# Altium PCB PCB1.PcbDoc
Units mil, origin at the board's own origin, x right, y up, seen from the top; angles counter-clockwise.
Board outline 6445 x 7795 mil, 2 copper layers (Top Layer, Bottom Layer); 48 components, 56 nets, 155 pads, 18 vias.
Unrouted connection lines stored in the file: 4.
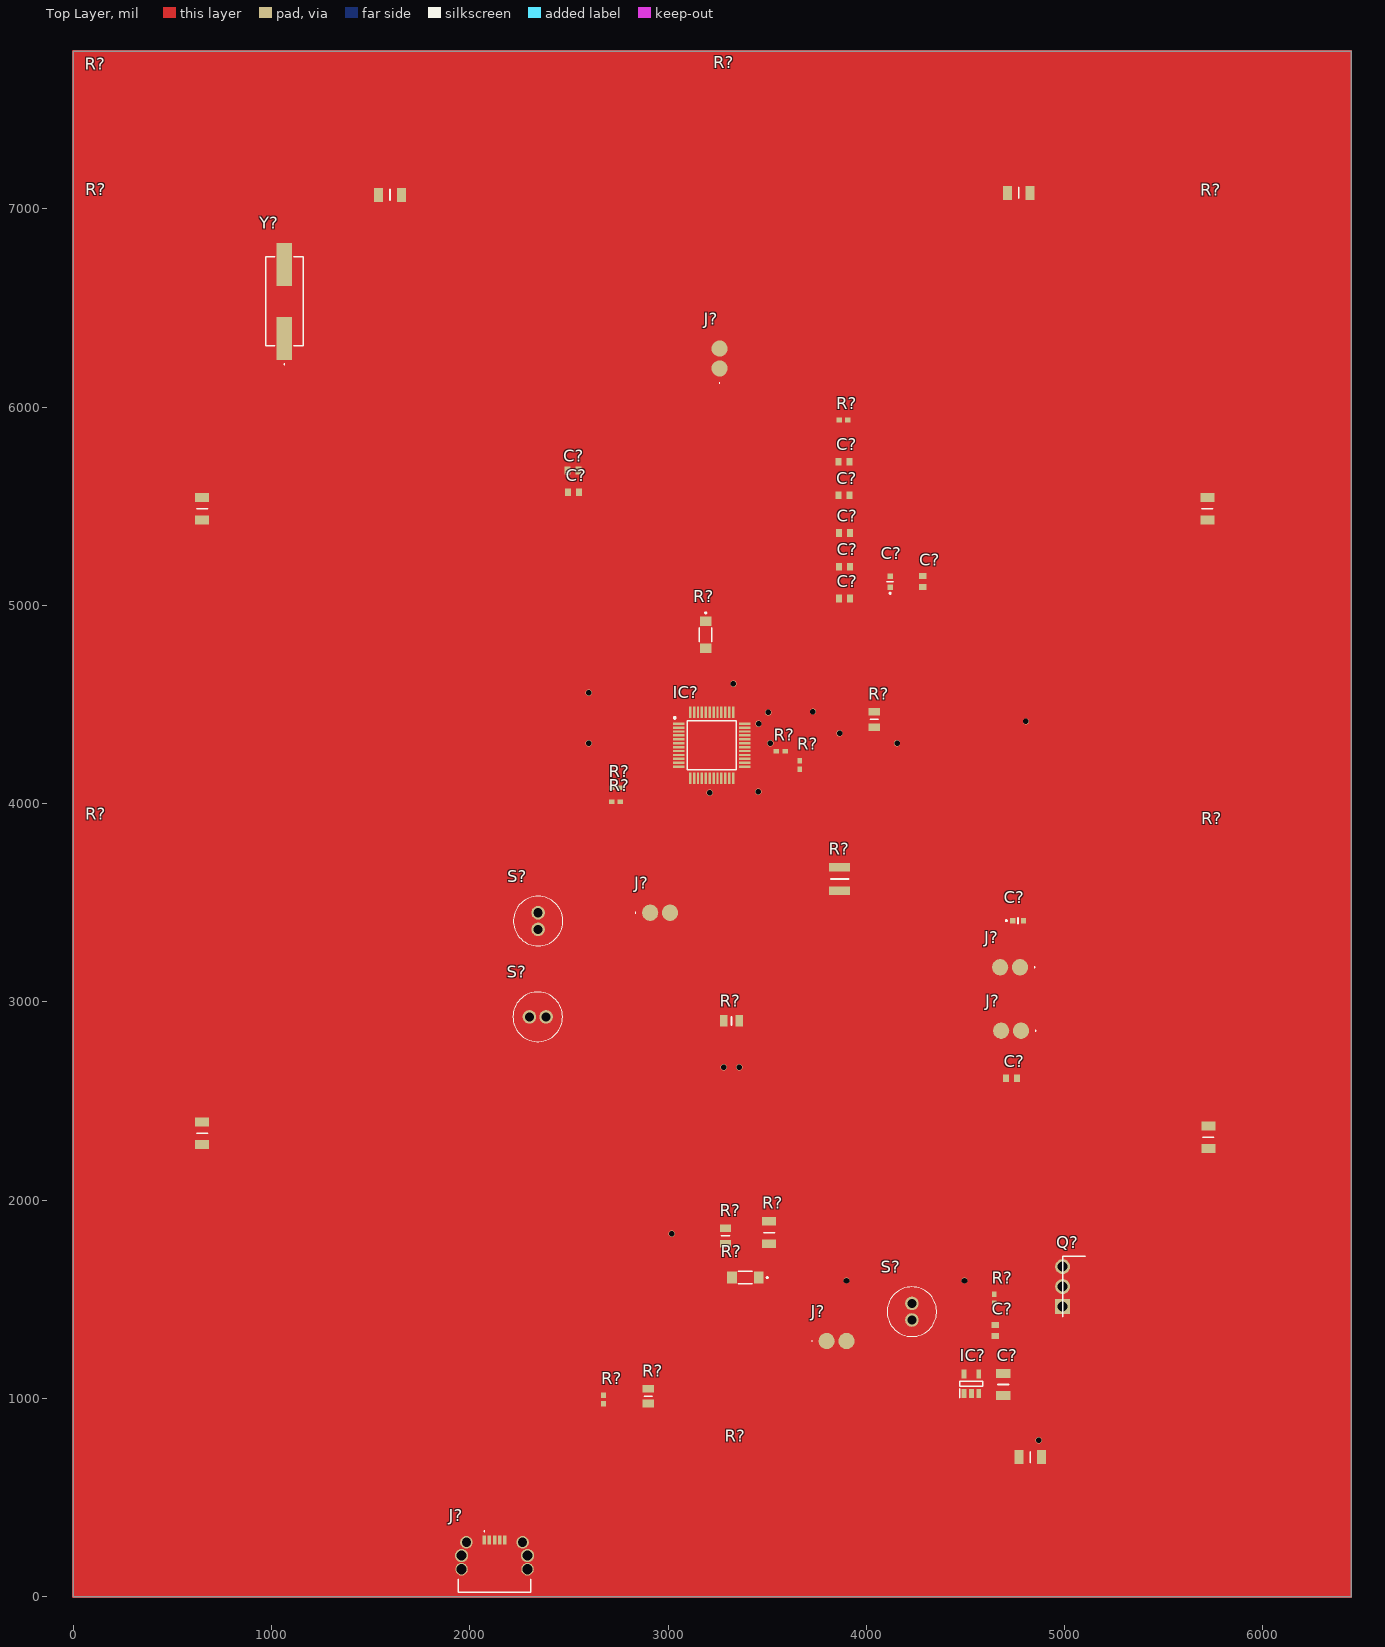
[diagram p0: Top Layer view]
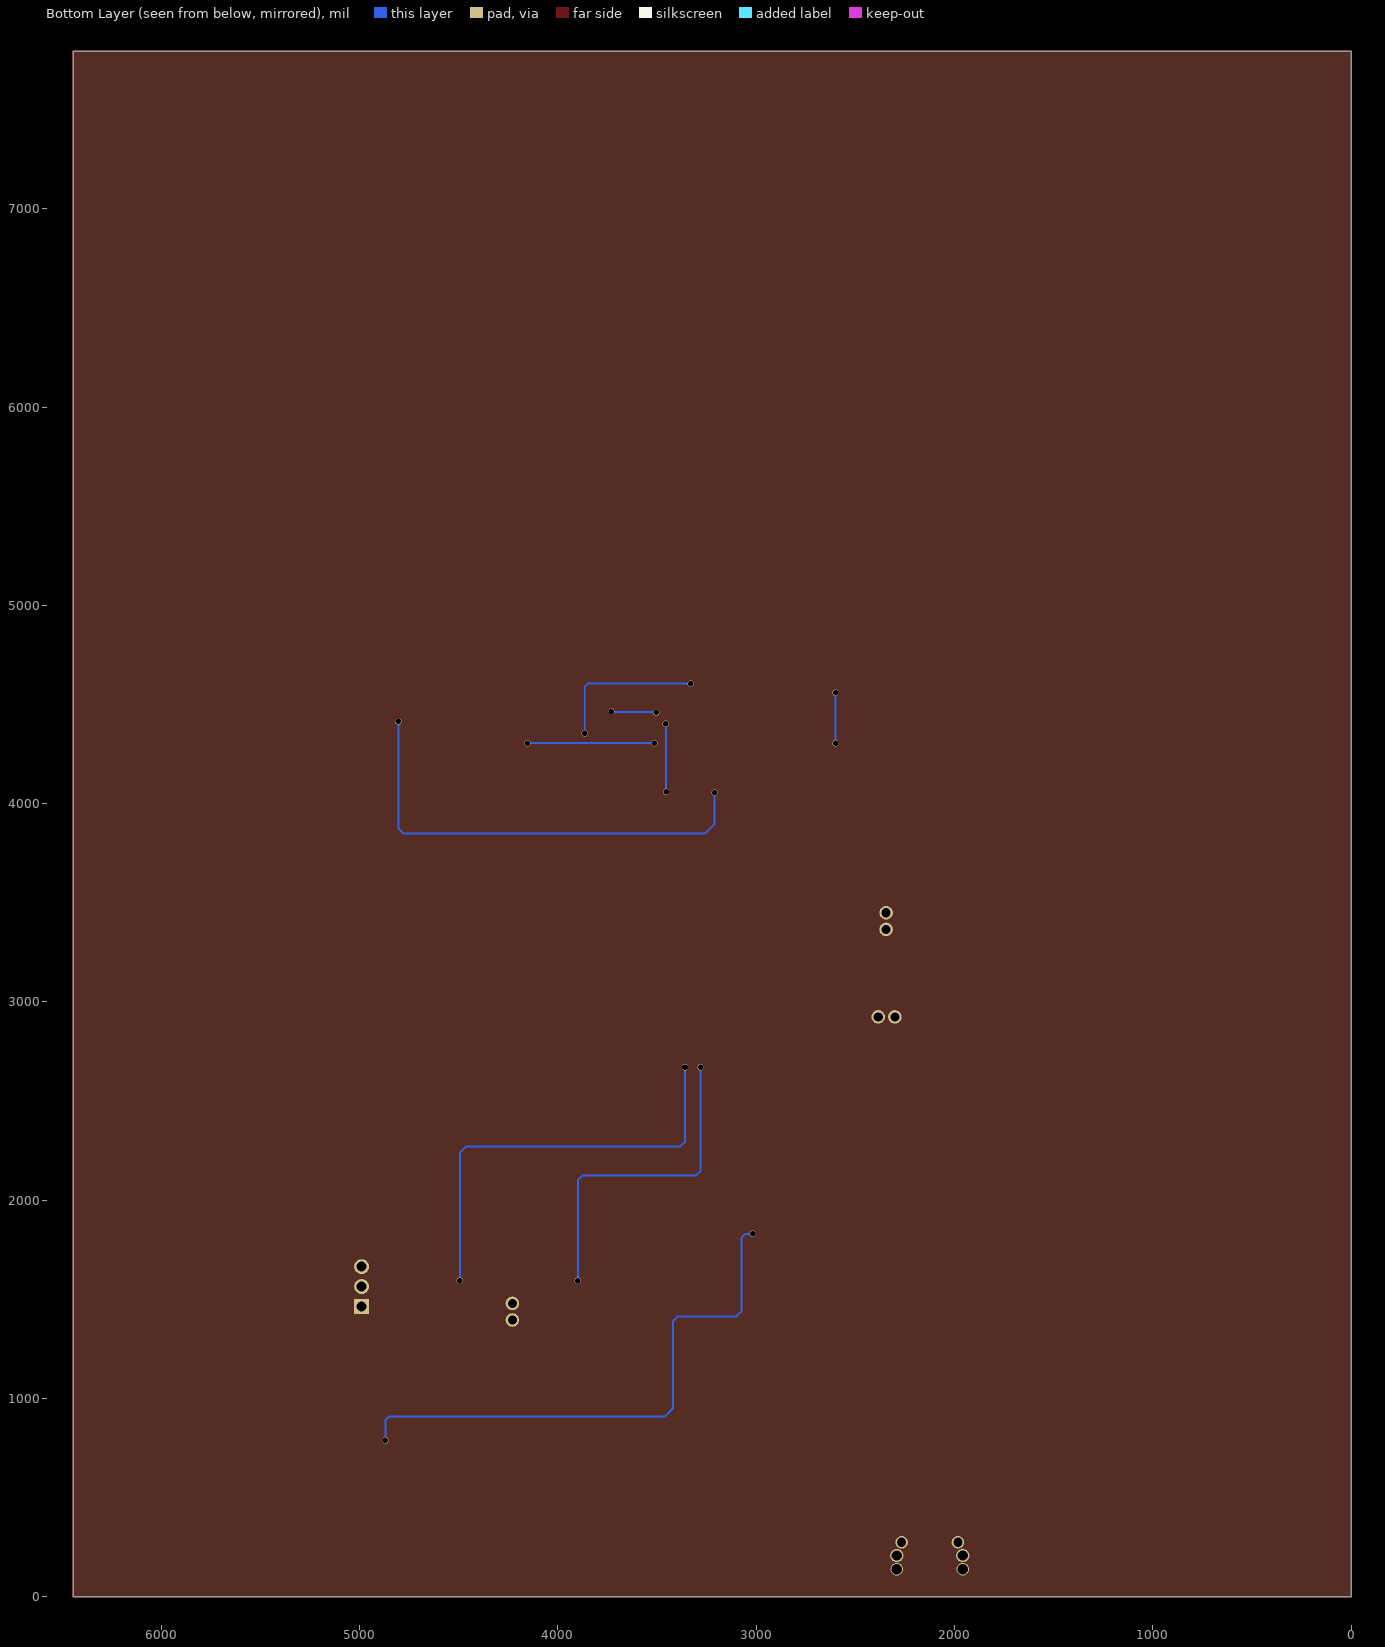
[diagram p1: Bottom Layer view, seen from below]
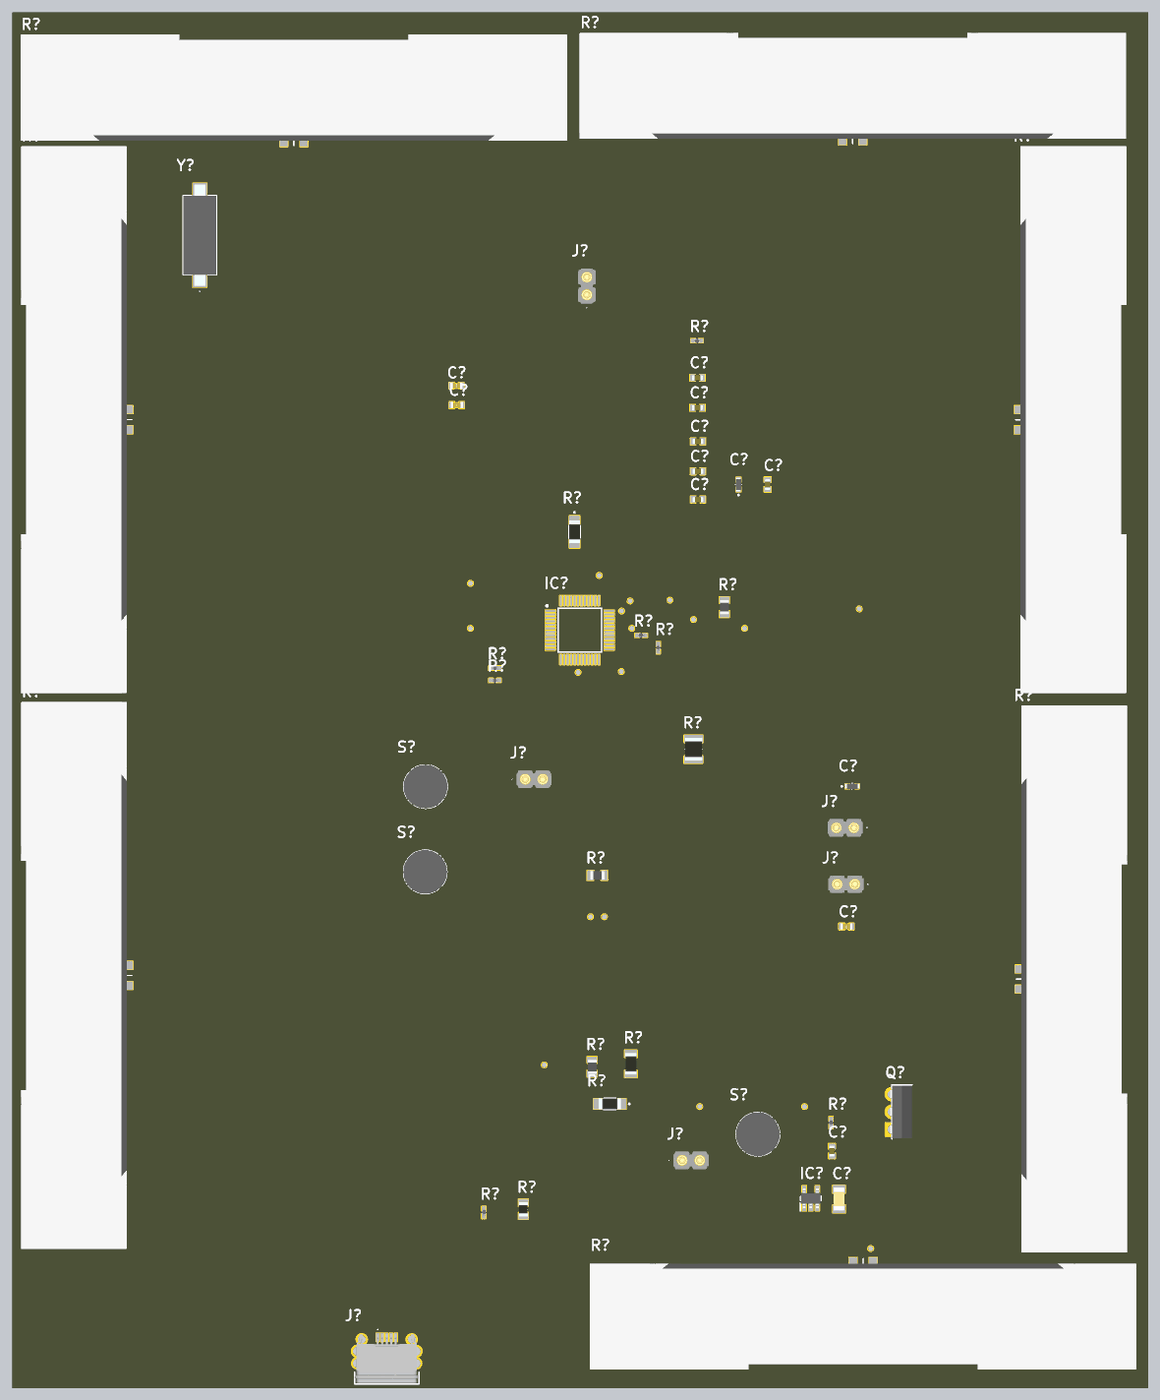
[diagram p2: 3D render of the assembled board from above, using the file's embedded part models]

## Layer stack, top to bottom
Top Solder: solder mask 0.4, Solder Resist, Dk 3.5
Top Layer: signal copper 1.4
Dielectric 1: dielectric 12.6, FR-4, Dk 4.8
Bottom Layer: signal copper 1.4
Bottom Solder: solder mask 0.4, Solder Resist, Dk 3.5

## Board outline
0,0 0,7795 6445,7795 6445,0

## Design rules (kind name [scope] priority, off if disabled: settings)
Clearance [All] p1: gap=10 ignorepadtopadclearanceinfootprint=FALSE
PolygonConnect [All] p1: connectstyle=Relief reliefconductorwidth=10 reliefentries=4 polygonreliefangle="90 Angle" airgapwidth=10
RoutingVias [All] p1: holewidth=28 width=50 viastyle="Through Hole" minholewidth=28 minwidth=50 maxholewidth=28 maxwidth=50
SolderMaskExpansion [All] p1: expansion=4 istentingtop=FALSE
SupplyNets "Schematic Supply Nets_5" [InNet('E5V')] p1: voltage=0.000
SupplyNets "Schematic Supply Nets_4" [InNet('+33V3')] p2: voltage=0.000
SupplyNets "Schematic Supply Nets_3" [InNet('GND')] p3: voltage=0.000
SupplyNets "Schematic Supply Nets_2" [InNet('+3VC_ST_LINK')] p4: voltage=0.000
SupplyNets "Schematic Supply Nets_1" [InNet('U5V')] p5: voltage=0.000
SupplyNets "Schematic Supply Nets" [InNet('+33V3_ST_LINK')] p6: voltage=0.000
Width [All] p1: maxlimit=10 minlimit=10 preferedwidth=10
30 further rules are at their usual default settings.

## Classes and differential pairs
component class Sheet2: C? CN? D? GREEN IC? J? Q? RED SB? Y?

## Components (designator, comment, footprint, x,y, rotation, side; value= is the part's Value field where it differs from the comment)
C? "C0603C200F5GACTU" CAPC1608X87N 4732.44,2615 r180 top
C? "06035C104K4T4A" CAPC1608X90N 3890,5365 r180 top
C? "06035C104K4T4A" CAPC1608X90N 4285,5120 r90 top
C? "C0603C200F5GACTU" CAPC1608X87N 2522.56,5570 r0 top
C? "KGM31GCG2J103JU" CAPC3316X145N 4690,1070.91 r90 top
C? "06035C104K4T4A" CAPC1608X90N 4650,1342.44 r90 top
C? "06035C104K4T4A" CAPC1608X90N 3887.56,5725 r0 top
C? "06035C104K4T4A" CAPC1608X90N 3887.44,5555 r180 top
C? "06035C104K4T4A" CAPC1608X90N 3890,5035 r0 top
C? "MAJCT168BB7105KTEA01" MAJx16 4765,3410 r0 top
C? "C0603C200F5GACTU" CAPC1608X87N 2520,5680 r0 top
C? "MAJCT168BB7105KTEA01" MAJx16 4120,5120 r90 top
C? "06035C104K4T4A" CAPC1608X90N 3890,5195 r180 top
IC? "STM32F103CBT6" QFP50P900X900X160-48N 3220,4295 r0 top
IC? "LD3985M33R" SOT95P280X145-5N 4530,1075 r90 top
J? "" 8122200230004191 2960,3450 r0 top
J? "" 8122200230004191 4725,3175 r180 top
J? "204926-1103" 2049261103 2125,160 r0 top
J? "812-22-002-30-004191" 8122200230004191 3260,6245 r90 top
J? "" 8122200230004191 4730,2855 r180 top
J? "" 8122200230004191 3850,1290 r0 top
Q? "BD139" TO254P290X760X1320-3P 4990,1465 r90 top
R? "MCS04020C1000FE000" RESC1005X37N 2675,995 r270 top
R? "CRMV1206AF10K0FKE5" RESC3216X74N 650,2337.91 r270 top
R? "MCS04020D4701BE000" RESC1005X37N 2738.35,4080 r0 top
R? "CRMV1206AF10K0FKE5" RESC3216X74N 5724.61,2317.46 r90 top
R? "MCS04020D4701BE000" RESC1005X37N 2738.35,4010 r0 top
R? "CRMV1206AF10K0FKE5" RESC3216X74N 650,5487.91 r270 top
R? "CRMV1206AF10K0FKE5" RESC3216X74N 1597.91,7070 r180 top
R? "CRMV1206AF10K0FKE5" RESC3216X74N 4767.91,7080 r180 top
R? "TNPW080536K0BEEA" RESC2012X55N 2900,1012.4 r270 top
R? "MCS04020C1000FE000" RESC1005X37N 3568.35,4265 r0 top
R? "CRCW12102K70FKEAHP" RESC3225X70N 3865,3620 r90 top
R? "MCS04020D4701BE000" RESC1005X37N 3885,5935 r0 top
R? "ERA-8VRB1003V" ERA8KEB1004V 3190,4852.09 r270 top
R? "CRCW12061K50FKEAHP" RESC3116X65N 3510,1837.09 r270 top
R? "WSL080500000ZEA9" RESC2013X84N 3320,2905 r0 top
R? "MCS04020C1000FE000" RESC1005X37N 3665,4195 r90 top
R? "CRMV1206AF10K0FKE5" RESC3216X74N 5720,5487.09 r90 top
R? "WSL080500000ZEA9" RESC2013X84N 3290,1820 r90 top
R? "MCS04020D4701BE000" RESC1005X37N 4645,1503.35 r90 top
R? "WSL080500000ZEA9" RESC2013X84N 4040,4425 r90 top
R? "ERA-8VRB1003V" ERA8KEB1004V 3390,1610 r180 top
R? "CRMV1206AF10K0FKE5" RESC3216X74N 4827.09,705 r0 top
S? "8631CQD2" 8631CQD2 2301.14,2925 r0 top
S? "8631CQD2" 8631CQD2 2345,3366.14 r90 top
S? "8631CQD2" 8631CQD2 4230,1396.14 r90 top
Y? "ECS-80-12-5PX-GM-TR" ECS80125PXGMTR 1065,6532.99 r90 top

## Footprints (in the part's own frame and the unit in brackets; to place one, negate y for a bottom-side part, rotate by r counter-clockwise, add the part's x,y. Pads: shape width x height; smd on the part's side, far side on the other; paste and mask are expansions set on the pad)
8631CQD2 [mm]
  round 1.74 hole 1.16: 1(0,0) 2(2.13,0)
  silkscreen extent -2.11,-3.17 4.24,3.17, body extent -2.11,-3.17 4.24,3.17, height 14.03
2049261103 [mm]
  rect 0.45x1.2 smd: 1(-1.3,3.225) 2(-0.65,3.225) 3(0,3.225) 4(0.65,3.225) 5(1.3,3.225)
  round 1.6 hole 1.17: MH1(-3.6,2.925) MH2(3.6,2.925)
  round 1.7 hole 1.3: MH3(-4.225,1.225) MH4(4.225,1.225)
  round 1.6 hole 1.3: MH5(-4.225,-0.525) MH6(4.225,-0.525)
  silkscreen extent -4.65,-3.47 4.65,4.4, body extent -4.65,-3.32 4.65,3.68, height 3.83
8122200230004191 [mm]
  round 2.08 smd: 1(-1.27,0) 2(1.27,0)
  silkscreen extent -3.2,-0.05 -3.1,0.05, body extent -2.54,-1.27 2.54,1.27, height 8.51
CAPC1608X87N [mm]
  rect 0.78x0.98 smd: 1(-0.7,0) 2(0.7,0)
  body extent -0.87,-0.48 0.88,0.47, height 0.87
CAPC1608X90N [mm]
  rect 0.78x0.99 smd: 1(-0.7,0) 2(0.7,0)
  body extent -0.8,-0.41 0.8,0.41, height 0.9
CAPC3316X145N [mm]
  rect 1.17x1.82 smd: 1(-1.42,0) 2(1.42,0)
  silkscreen extent 0,-0.7 0,0.7, body extent -1.65,-0.8 1.65,0.8, height 1.68
ECS80125PXGMTR [mm]
  rect 5.5x2 smd: 1(-4.75,0) 2(4.75,0)
  silkscreen extent -8.1,-2.4 5.7,2.4, body extent -7.3,-2.4 7.3,2.4, height 4.4
ERA8KEB1004V [mm]
  rect 1.25x1.5 smd: 1(-1.725,0) 2(1.725,0)
  silkscreen extent -2.9,-0.8 0.9,0.8, body extent -1.6,-0.8 1.6,0.8, height 0.65
MAJx16 [mm]
  rect 0.7x0.7 smd: 1(-0.7,0) 2(0.7,0)
  silkscreen extent -1.6,-0.4 0,0.4, body extent -0.98,-0.4 0.98,0.4, height 0.9
QFP50P900X900X160-48N [mm]
  rect 1.475x0.3 smd: 1(-4.238,2.75) 2(-4.238,2.25) 3(-4.238,1.75) 4(-4.238,1.25) 5(-4.238,0.75) 6(-4.238,0.25) 7(-4.238,-0.25) 8(-4.238,-0.75) 9(-4.238,-1.25) 10(-4.238,-1.75) 11(-4.238,-2.25) 12(-4.238,-2.75) 25(4.238,-2.75) 26(4.238,-2.25) 27(4.238,-1.75) 28(4.238,-1.25) 29(4.238,-0.75) 30(4.238,-0.25) 31(4.238,0.25) 32(4.238,0.75) 33(4.238,1.25) 34(4.238,1.75) 35(4.238,2.25) 36(4.238,2.75)
  rect 0.3x1.475 smd: 13(-2.75,-4.238) 14(-2.25,-4.238) 15(-1.75,-4.238) 16(-1.25,-4.238) 17(-0.75,-4.238) 18(-0.25,-4.238) 19(0.25,-4.238) 20(0.75,-4.238) 21(1.25,-4.238) 22(1.75,-4.238) 23(2.25,-4.238) 24(2.75,-4.238) 37(2.75,4.238) 38(2.25,4.238) 39(1.75,4.238) 40(1.25,4.238) 41(0.75,4.238) 42(0.25,4.238) 43(-0.25,4.238) 44(-0.75,4.238) 45(-1.25,4.238) 46(-1.75,4.238) 47(-2.25,4.238) 48(-2.75,4.238)
  silkscreen extent -4.85,-3.15 3.15,3.62, body extent 0,0 0,0
RESC1005X37N [mm]
  rect 0.7x0.6 smd: 1(-0.55,0) 2(0.55,0)
  body extent -0.5,-0.25 0.5,0.25, height 0.32
RESC2012X55N [mm]
  rect 1x1.45 smd: 1(-0.95,0) 2(0.95,0)
  silkscreen extent 0,-0.53 0,0.53, body extent -1,-0.63 1,0.63, height 0.55
RESC2013X84N [mm]
  rect 0.95x1.45 smd: 1(-1,0) 2(1,0)
  silkscreen extent 0,-0.54 0,0.54, body extent -1.01,-0.64 1.01,0.64, height 0.36
RESC3116X65N [mm]
  rect 1.1x1.8 smd: 1(-1.45,0) 2(1.45,0)
  silkscreen extent 0,-0.7 0,0.7, body extent -1.55,-0.8 1.55,0.8, height 0.65
RESC3216X74N [mm]
  rect 1.15x1.8 smd: 1(-1.45,0) 2(1.45,0)
  silkscreen extent 0,-0.7 0,0.7, body extent -39.37,-15.24 39.37,0, height 40.64
RESC3225X70N [mm]
  rect 1.1x2.7 smd: 1(-1.5,0) 2(1.5,0)
  silkscreen extent 0,-1.15 0,1.15, body extent -1.6,-1.25 1.6,1.25, height 0.7
SOT95P280X145-5N [mm]
  rect 1.15x0.6 smd: 1(-1.25,0.95) 2(-1.25,0) 3(-1.25,-0.95) 4(1.25,-0.95) 5(1.25,0.95)
  silkscreen extent -1.83,-1.48 0.33,1.5, body extent -1.4,-1.48 1.4,1.48, height 1.45
TO254P290X760X1320-3P [mm]
  rect 1.92x1.92 hole 1.28: 1(0,0)
  round 1.92 hole 1.28: 2(2.54,0) 3(5.08,0)
  silkscreen extent -1.36,-2.9 6.44,0, body extent -1.26,-2.9 6.34,0.26, height 12.92

## Part data
C? C? C?: "Capacitor", Manufacturer_Name=KEMET, Mouser Part Number=80-C0603C200F5GACTU, Arrow Part Number=C0603C200F5GACTU, Arrow Price/Stock=https://www.arrow.com/en/products/c0603c200f5gactu/kemet-corporation, Datasheet Link=https://content.kemet.com/datasheets/KEM_C1003_C0G_SMD.pdf, Height=0.87mm, Manufacturer_Part_Number=C0603C200F5GACTU, Mouser Price/Stock=https://www.mouser.co.uk/ProductDetail/KEMET/C0603C200F5GACTU?qs=gt1LBUVyoHmxLY5yAwiOrg%3D%3D
C? C? C? C? C? C? C?: "Capacitor", Manufacturer_Name="Kyocera AVX", Mouser Part Number=581-06035C104K4T4A, Arrow Part Number=06035C104K4T4A, Arrow Price/Stock=https://www.arrow.com/en/products/06035c104k4t4a/avx, Datasheet Link=https://componentsearchengine.com/Datasheets/1/06031A100FAT2A.pdf, Height=0.9mm, Manufacturer_Part_Number=06035C104K4T4A, Mouser Price/Stock=https://www.mouser.co.uk/ProductDetail/KYOCERA-AVX/06035C104K4T4A?qs=NBj5Hwer2CEXBYKT%252BbuSBA%3D%3D
C?: "Capacitor", Manufacturer_Name="Kyocera AVX", Mouser Part Number=581-KGM31GCG2J103JU, Datasheet Link=https://datasheets.kyocera-avx.com/HVKGM.pdf, Height=1.45mm, Manufacturer_Part_Number=KGM31GCG2J103JU, Mouser Price/Stock=https://www.mouser.co.uk/ProductDetail/KYOCERA-AVX/KGM31GCG2J103JU?qs=63Lh8XYXgjt6ivbLeGkCxg%3D%3D
C? C?: "Capacitor", Manufacturer_Name="TAIYO YUDEN", Datasheet Link=https://ds.yuden.co.jp/TYCOMPAS/or/detail?pn=MAJCT168BB7105KTEA01, Height=0.8mm, Manufacturer_Part_Number=MAJCT168BB7105KTEA01
IC?: "Integrated Circuit", Manufacturer_Name=STMicroelectronics, Mouser Part Number=511-STM32F103CBT6, Arrow Part Number=STM32F103CBT6, Arrow Price/Stock=https://www.arrow.com/en/products/stm32f103cbt6/stmicroelectronics?region=europe, Datasheet Link=http://www.st.com/st-web-ui/static/active/en/resource/technical/document/datasheet/CD00161566.pdf, Height=1.6mm, Manufacturer_Part_Number=STM32F103CBT6, Mouser Price/Stock=https://www.mouser.co.uk/ProductDetail/STMicroelectronics/STM32F103CBT6?qs=WxFF5lh7QM3goh6GV5Ogig%3D%3D
IC?: "Integrated Circuit", Manufacturer_Name=STMicroelectronics, Mouser Part Number=511-LD3985M33R, Arrow Part Number=LD3985M33R, Arrow Price/Stock=https://www.arrow.com/en/products/ld3985m33r/stmicroelectronics?region=europe, Datasheet Link=http://www.st.com/st-web-ui/static/active/en/resource/technical/document/datasheet/CD00003395.pdf, Height=1.45mm, Manufacturer_Part_Number=LD3985M33R, Mouser Price/Stock=https://www.mouser.co.uk/ProductDetail/STMicroelectronics/LD3985M33R?qs=22WmWNTp1rrPOccVv4HZ7A%3D%3D
J? J? J? J?: library part 812-22-002-30-004191, "Connector", Manufacturer_Name=Mill-Max, Mouser Part Number=575-8122200230004191, Datasheet Link=https://www.mill-max.com/products/datasheet/sockets/812-22-002-30-004191, Height=8.51mm, Manufacturer_Part_Number=812-22-002-30-004191, Mouser Price/Stock=https://www.mouser.co.uk/ProductDetail/Mill-Max/812-22-002-30-004191?qs=iJx90KzHWBrdg0l0AGRrFg%3D%3D
J?: "Connector", Manufacturer_Name=Molex, Mouser Part Number=538-204926-1103, Arrow Part Number=204926-1103, Arrow Price/Stock=https://www.arrow.com/en/products/204926-1103/molex?region=nac, Datasheet Link=https://www.molex.com/content/dam/molex/molex-dot-com/products/automated/en-us/salesdrawingpdf/204/204926/2049261103_sd.pdf, Height=4.65mm, Manufacturer_Part_Number=204926-1103, Mouser Price/Stock=https://www.mouser.co.uk/ProductDetail/Molex/204926-1103?qs=55YtniHzbhBOQihiQOeiLg%3D%3D
J?: "Connector", Manufacturer_Name=Mill-Max, Mouser Part Number=575-8122200230004191, Datasheet Link=https://www.mill-max.com/products/datasheet/sockets/812-22-002-30-004191, Height=8.51mm, Manufacturer_Part_Number=812-22-002-30-004191, Mouser Price/Stock=https://www.mouser.co.uk/ProductDetail/Mill-Max/812-22-002-30-004191?qs=iJx90KzHWBrdg0l0AGRrFg%3D%3D
Q?: "Transistor BJT NPN", Manufacturer_Name=STMicroelectronics, Mouser Part Number=511-BD139, Arrow Part Number=BD139, Arrow Price/Stock=https://www.arrow.com/en/products/bd139/stmicroelectronics?region=europe, Datasheet Link=http://www.st.com/web/en/resource/technical/document/datasheet/CD00001225.pdf, Height=2.9mm, Manufacturer_Part_Number=BD139, Mouser Price/Stock=https://www.mouser.co.uk/ProductDetail/STMicroelectronics/BD139?qs=ljbEvF4DwOPW%2FLxHSWYMMA%3D%3D
R? R? R?: "Resistor", Manufacturer_Name=Vishay, Mouser Part Number=594-MCS04020C1000FE0, Arrow Part Number=MCS04020C1000FE000, Arrow Price/Stock=https://www.arrow.com/en/products/mcs04020c1000fe000/vishay, Datasheet Link=http://www.vishay.com/docs/28705/mcx0x0xpro.pdf, Height=0.37mm, Manufacturer_Part_Number=MCS04020C1000FE000, Mouser Price/Stock=https://www.mouser.co.uk/ProductDetail/Vishay-Beyschlag/MCS04020C1000FE000?qs=7ZE6F4QMOBYkwvQlfbkT8w%3D%3D
R? R? R? R? R? R? R?: "Resistor", Manufacturer_Name=Vishay, Mouser Part Number=71-RMV1206AF10K0FKE5, Datasheet Link=https://www.vishay.com/docs/68037/crmv.pdf, Height=0.74mm, Manufacturer_Part_Number=CRMV1206AF10K0FKE5, Mouser Price/Stock=https://www.mouser.co.uk/ProductDetail/Vishay-Techno/CRMV1206AF10K0FKE5?qs=l8RvIzyJx4lLA%2F4RSSc%2F9A%3D%3D
R? R? R? R?: "Resistor", Manufacturer_Name=Vishay, Mouser Part Number=594-MCS04020D4701BE0, Datasheet Link=http://www.vishay.com/docs/28705/mcx0x0xpro.pdf, Height=0.37mm, Manufacturer_Part_Number=MCS04020D4701BE000, Mouser Price/Stock=https://www.mouser.co.uk/ProductDetail/Vishay-Beyschlag/MCS04020D4701BE000?qs=ft9OtscSA3%252BR0DpF5QqL2Q%3D%3D
R?: "Resistor", Manufacturer_Name=Vishay, Datasheet Link=https://www.vishay.com/docs/31006/tnpw.pdf, Height=0.55mm, Manufacturer_Part_Number=TNPW080536K0BEEA
R?: "Resistor", Manufacturer_Name=Vishay, Mouser Part Number=71-CRCW12102K70FKEAH, Datasheet Link=http://componentsearchengine.com/Datasheets/1/CRCW12102K70FKEAHP.pdf, Height=0.7mm, Manufacturer_Part_Number=CRCW12102K70FKEAHP, Mouser Price/Stock=https://www.mouser.co.uk/ProductDetail/Vishay-Dale/CRCW12102K70FKEAHP?qs=OAzHGkhREL0m0%252BU1n6AaAg%3D%3D
R? R?: "Resistor", Manufacturer_Name=Panasonic, Mouser Part Number=667-ERA-8VRB1003V, Datasheet Link=https://industrial.panasonic.com/cdbs/www-data/pdf/RDM0000/RDM0000C331.pdf, Height=0.65mm, Manufacturer_Part_Number=ERA-8VRB1003V, Mouser Price/Stock=https://www.mouser.co.uk/ProductDetail/Panasonic/ERA-8VRB1003V?qs=By6Nw2ByBD3GbaEFFbsd4A%3D%3D
R?: "Resistor", Manufacturer_Name=Vishay, Mouser Part Number=71-CRCW12061K50FKEAH, Arrow Part Number=CRCW12061K50FKEAHP, Arrow Price/Stock=https://www.arrow.com/en/products/crcw12061k50fkeahp/vishay?region=nac, Datasheet Link=http://componentsearchengine.com/Datasheets/1/CRCW12061K50FKEAHP.pdf, Height=0.65mm, Manufacturer_Part_Number=CRCW12061K50FKEAHP, Mouser Price/Stock=https://www.mouser.co.uk/ProductDetail/Vishay-Dale/CRCW12061K50FKEAHP?qs=k2%2FDWSARqgEwHXAQbL4aEg%3D%3D
R? R? R?: "Resistor", Manufacturer_Name=Vishay, Mouser Part Number=71-WSL080500000ZEA9, Arrow Part Number=WSL080500000ZEA9, Arrow Price/Stock=https://www.arrow.com/en/products/wsl080500000zea9/vishay?region=nac, Datasheet Link=https://ad.componentsearchengine.com/Datasheets/2/WSL080500000ZEA9.pdf, Height=0.838mm, Manufacturer_Part_Number=WSL080500000ZEA9, Mouser Price/Stock=https://www.mouser.co.uk/ProductDetail/Vishay-Dale/WSL080500000ZEA9?qs=f1l5vAGoKgsImKS87N8TmQ%3D%3D
S? S? S?: "Switch (2-Pin Push)", Manufacturer_Name="C & K COMPONENTS", Mouser Part Number=611-8631-261, Datasheet Link=https://www.ckswitches.com/media/1396/8600.pdf, Height=13.93mm, Manufacturer_Part_Number=8631CQD2, Mouser Price/Stock=https://www.mouser.co.uk/ProductDetail/CK/8631CQD2?qs=ktcBc77oICXe9iPhfEwnkA%3D%3D
Y?: "Crystal or Oscillator", Manufacturer_Name=ECS, Mouser Part Number=520-80-12-5PX-GM-TR, Datasheet Link=https://ecsxtal.com/store/pdf/csm-7x.pdf, Height=4.3mm, Manufacturer_Part_Number=ECS-80-12-5PX-GM-TR, Mouser Price/Stock=https://www.mouser.co.uk/ProductDetail/ECS/ECS-80-12-5PX-GM-TR?qs=amGC7iS6iy%252BwzUdIY7WpOA%3D%3D

## Via types
v1: diameter 31.5, hole 28, Top Layer to Bottom Layer, 18 vias

## Nets (pads, with @x,y where several pads share a name; then routed paths per layer and width w, separated by ;. In a path a pad name is that pad's centre, name@x,y a point inside that pad or via, vN(x,y) a via of type N, cw(c..) or ccw(c..) an arc to the next point about the centre after c; other vN are vias at no path point)
+3VC_ST_LINK: 
+33V3: R?.1@2716.69,4080
+33V3_ST_LINK: C?.1@3915,5555 C?.1@3917.56,5195 C?.1@3917.56,5365 C?.2@3915.12,5725 C?.2@4120,5147.56 C?.2@4285,5147.56 IC?.1@3053.15,4403.27 IC?.5@4492.6,1124.21 IC?.9 IC?.24 IC?.36 IC?.48 J?.1@3260,6195 Q?.2 R?.2@3359.37,2905 R?.2@4645,1525 | length 8827.1
  Top Layer w10: J?.1@3260,6195 3265,6190 3665,6190 3695,6160 3695,5645.12 3700.06,5640.06 3915.12,5640.06 ; IC?.24@3329.17,4127.24 IC?.24 3328.27,4077.54 3345.67,4060.14 ; v1(3359.37,2670.63) 3359.37,2914.84 3345.67,2928.54 3345.67,4060.14 ; v1(3455,4060) 3454.86,4060.14 3345.67,4060.14 ; v1(3456.73,4403.27) IC?.36 3387.76,4404.17 3387.76,4472.76 3385,4475.51 3385,5430 3416.28,5461.28 3915,5461.28 ; C?.2@3915.12,5725 3915.12,5640.06 ; C?.2@4285,5147.56 4120,5147.56 4007.44,5147.56 3960,5195 3917.56,5195 3917.56,5365 3915,5367.56 3915,5461.28 ; IC?.5@4492.6,1124.21 4495,1126.61 v1(4495,1595) ; 4500.86,1525 4645,1525 4770,1525 4805,1560 4985,1560 Q?.2 ; 3915,5461.28 3915,5555 3915.12,5555.12 3915.12,5640.06
  Bottom Layer w10: v1(3359.37,2670.63) 3359.37,2295.63 3385,2270 4465,2270 4495,2240 v1(4495,1595) ; v1(3455,4060) 3455.87,4060.87 3455.87,4402.4 v1(3456.73,4403.27)
"AIN 1": 
E5V: J?.1@2073.82,286.97 R?.1@3865,3560.94 R?.2@4884.17,705 | length 7929.4
  Top Layer w10: J?.1@2073.82,286.97 2073.82,1763.82 2141.18,1831.18 2952.89,1831.18 ; v1(3018.82,1831.18) 2952.89,1831.18 ; R?.1@3865,3560.94 3865,2575 3845,2555 3050,2555 3005,2510 3005,1960 2952.89,1907.89 2952.89,1831.18 ; v1(4870,790) 4870,719.17 R?.2@4884.17,705
  Bottom Layer w10: v1(3018.82,1831.18) 3020,1830 3055,1830 3075,1810 3075,1440 3100,1415 3395,1415 3420,1390 3420,950 3460,910 4850,910 4870,890 v1(4870,790)
GND: C?.1@3860,5725 C?.1@3862.44,5035 C?.1@4120,5092.44 C?.1@4285,5092.44 C?.1@4650,1314.88 C?.1@4690,1015 C?.1@4737.44,3410 C?.2@2547.56,5680 C?.2@2550.12,5570 C?.2@3859.88,5555 C?.2@3862.44,5195 C?.2@3862.44,5365 C?.2@4704.88,2615 IC?.2@4530,1025.79 IC?.8 IC?.20 IC?.23 IC?.35 IC?.47 J?.1@3800,1290 J?.1@4775,3175 J?.1@4780,2855 J?.2@4675,3175 J?.2@4680,2855 J?.5 R?.1@650,2395 R?.1@650,5545 R?.1@2716.69,4010 R?.1@2900,1049.8 R?.1@3190,4920 R?.1@3457.91,1610 R?.2@1540.83,7070 R?.2@3906.65,5935 S?.1@4230,1396.14 | length 0.2
  Top Layer w10: C?.2@2550,5569.88 C?.2@2550.12,5570
"LED STLINK": 
NetC?_1: C?.1@2495,5570 IC?.6 Y?.1 | length 3979.6
  Top Layer w10: Y?.1 1065,5605 1100,5570 2495,5570 2495,5510 2525,5480 2580,5480 2600,5460 v1(2600,4560) ; v1@2600,4305 v1(2600.16,4304.84) IC?.6
  Bottom Layer w10: v1(2600,4560) 2600.08,4559.92 2600.08,4304.92 v1(2600.16,4304.84)
NetC?_2: C?.2@4690,1126.81 IC?.4@4567.4,1124.21 | length 123.7
  Top Layer w10: IC?.4@4567.4,1124.21 4687.4,1124.21 C?.2@4690,1126.81
NetCN?_1: 
NetCN?_2: 
NetCN?_3: 
NetCN?_4: 
NetD?_1: 
NetD?_2: R?.1@1655,7070
NetGREEN_1: 
NetGREEN_2: 
NetIC?_2: IC?.2@3053.15,4383.58 R?.2@650,5430.83 | length 3363.5
  Top Layer w10: R?.2@650,5430.83 2429.17,5430.83 2495,5365 2495,4465 2560,4400 2954.88,4400 2969.7,4385.18 ; 2969.7,4383.58 IC?.2@3053.15,4383.58
NetIC?_3: IC?.3@3053.15,4363.9 R?.2@650,2280.83 | length 4432.4
  Top Layer w9.96: 2875.01,4365.63 2919.54,4365.2 3008.61,4364.33 IC?.3@3053.15,4363.9
  Top Layer w10: R?.2@650,2280.83 1315.83,2280.83 1355,2320 1355,4310 1410.63,4365.63 2875.01,4365.63
NetIC?_10: IC?.10 R?.2@2760,4010 R?.2@2760,4080 | length 485.2
  Top Layer w10: R?.2@2760,4010 2760,4080 2900,4080 2920,4100 2920,4205 2940,4225 3015.58,4225 3016.68,4226.1 IC?.10
NetIC?_12: IC?.12 J?.1@2910,3450 S?.2@2345,3450 | length 1402.9
  Top Layer w10: S?.2@2345,3450 2910,3450 2910,3620 2955,3665 2955,4160 2981.73,4186.73 IC?.12
NetIC?_13: IC?.13 J?.2@3010,3450 S?.2@2385,2925 | length 1872.3
  Top Layer w10: S?.2@2385,2925 2390,2930 2975,2930 3005,2960 3005,3445 3010,3450 3010,3890 3040,3920 3090,3920 3110,3940 IC?.13@3110,4125
NetIC?_21: IC?.21 J?.2@3900,1290 R?.1@3280.63,2905 | length 3433.3
  Top Layer w10: IC?.21 3269.21,3060.79 3280,3050 3280,3035 3280.63,3034.37 3280.63,2905 v1(3280.63,2670.63) ; J?.2@3900,1290 v1(3900,1595)
  Bottom Layer w10: v1(3280.63,2670.63) 3280.63,2149.37 3305,2125 3875,2125 3900,2100 v1(3900,1595)
NetIC?_28: IC?.28
NetIC?_29: IC?.29 R?.1@3546.69,4265 | length 160
  Top Layer w10: IC?.29 3546.22,4265.47 R?.1@3546.69,4265
NetIC?_39: IC?.39 J?.2@3260,6295 R?.1@3863.35,5935 R?.2@3865,3679.06 | length 4590.3
  Top Layer w10: IC?.39 3288.9,4498.32 3290,4499.42 3290,4605 ; v1(3330,4605) 3290,4605 ; R?.1@3863.35,5935 3863.35,6276.65 3845,6295 3260,6295 3125,6295 3100,6270 3100,5175 3125,5150 3275,5150 3290,5135 3290,4605 ; R?.2@3865,3679.06 v1(3865,4355)
  Bottom Layer w10: v1(3330,4605) 3850,4605 3865,4590 v1(3865,4355)
NetIC?_44: IC?.44 R?.2@3190,4784.17 | length 322.5
  Top Layer w10: R?.2@3190,4784.17 3190.47,4783.7 IC?.44
NetJ?_2: J?.2@2099.41,286.97 R?.1@4040,4385.63 | length 5987.4
  Top Layer w10: J?.2@2099.41,286.97 2099.41,1754.41 2150,1805 2886.38,1805 2886.97,1805.59 2959.41,1805.59 2975,1790 3135,1790 3155,1810 3155,2370 3185,2400 4015,2400 4040,2425 R?.1@4040,4385.63
NetJ?_3: J?.3 R?.1@3290,1780.63 R?.2@3510,1780 | length 2871.7
  Top Layer w10: J?.3 2125,1740 2165,1780 2935,1780 2955,1760 3175,1760 3195.63,1780.63 3290,1780.63 3290.63,1780 R?.2@3510,1780
NetJ?_4: J?.4 R?.2@3322.09,1610 | length 2732.2
  Top Layer w10: J?.4 2150.59,1730.59 2175,1755 2886.38,1755 2886.97,1754.41 2925.59,1754.41 2950,1730 3135,1730 3155,1710 3155,1630 3175,1610 R?.2@3322.09,1610
NetJ?_5: R?.1@5720,5430
NetJ?_6: R?.1@5724.61,2260.37
NetQ?_1: Q?.1 R?.1@4770,705 R?.2@2675,973.35 R?.2@2900,975 | length 3271.9
  Top Layer w10: R?.2@2675,973.35 2898.35,973.35 2900,975 3265,975 3300,940 3300,790 3335,755 4749,755 4754.86,749.14 4754.86,720.14 4770,705 4770,951.38 4770,1430 4805,1465 Q?.1
NetQ?_3: Q?.3 R?.1@3510,1894.17 | length 1678.1
  Top Layer w10: R?.1@3510,1894.17 3510.83,1895 3695,1895 3725,1865 3725,1690 3750,1665 Q?.3
NetR?_2: 
NetS?_1: S?.1@2301.14,2925 S?.1@2345,3366.14 | length 460.3
  Top Layer w10: S?.1@2301.14,2925 2300,2926.14 2300,3130 2345,3175 S?.1@2345,3366.14
NetS?_2: 
NetSB?_1: 
NetSB?_2: 
"STM JTCK": 
"STM JTMS": 
STM_JTCK: IC?.37
STM_JTMS: IC?.34
"T JTCK": IC?.15 IC?.26
"T JTDI": IC?.17
"T JTDO": IC?.16
"T JTMS": IC?.27 R?.2@3665,4216.65 R?.2@4710.83,7080 | length 4141
  Top Layer w10: IC?.27 3448.9,4226.1 3458.35,4216.65 3665,4216.65 3670,4221.65 3670,4805 3710,4845 4670,4845 4710.83,4885.83 R?.2@4710.83,7080
"T NRST": IC?.18 R?.2@5720,5544.17 | length 4426.7
  Top Layer w10: v1@3210,4045 v1(3210,4055) 3210,4091.84 3210.16,4092 IC?.18 ; v1(4805,4415) 4805,5505 4844.17,5544.17 R?.2@5720,5544.17
  Bottom Layer w10: v1(3210,4055) 3210,3897.94 3257.94,3850 4780,3850 4805,3875 v1(4805,4415)
"T SWDIO": IC?.25 R?.1@3665,4173.35 | length 283.7
  Top Layer w10: IC?.25 3443.27,4186.73 3456.65,4173.35 R?.1@3665,4173.35
"T SWO": IC?.31 R?.2@5724.61,2374.55 | length 4239.9
  Top Layer w9.96: IC?.31 v1(3515,4305)
  Top Layer w10: v1@4145,4305 v1(4155,4305) 5285,4305 5315,4275 5315,2410 5350.45,2374.55 R?.2@5724.61,2374.55
  Bottom Layer w10: v1(3515,4305) v1(4155,4305)
U5V: 
"USB DM": IC?.32 R?.2@4040,4464.37 | length 770.5
  Top Layer w10: IC?.32 3469.53,4324.53 3505,4360 v1(3505,4460) ; v1@3730,4465 v1(3730.63,4464.37) R?.2@4040,4464.37
  Bottom Layer w10: v1(3505,4460) 3507.18,4462.19 3728.44,4462.19 v1(3730.63,4464.37)
"USB DP": R?.2@3290,1859.37
"USB RENUM": R?.1@2675,1016.65
USB_DP: IC?.33
USB_RENUM: IC?.38
pads on no net: C?.1@2492.44,5680 C?.1@4760,2615 C?.2@3917.56,5035 C?.2@4650,1370 C?.2@4792.56,3410 IC?.1@4492.6,1025.79 IC?.3@4567.4,1025.79 IC?.4@3053.15,4344.21 IC?.5@3053.15,4324.53 IC?.7 IC?.11 IC?.14 IC?.19 IC?.22 IC?.30 IC?.40 IC?.41 IC?.42 IC?.43 IC?.45 IC?.46 J?.MH1 J?.MH2 J?.MH3 J?.MH4 J?.MH5 J?.MH6 R?.1@4645,1481.69 R?.1@4825,7080 R?.2@3590,4265 S?.2@4230,1480 Y?.2
copper on no net: | length 28480
  Top Layer w10: 0,0 6445,0 6445,7795 0,7795 0,0

## Other copper
Top Layer:
  rectangle net GND: 0,0 6445,7795

## Silkscreen, mask and mechanical layers (free items; w line width, h text height)
Mechanical 1:
  the board outline again, w10